# EAGLE board mi6k (EAGLE 4.11)
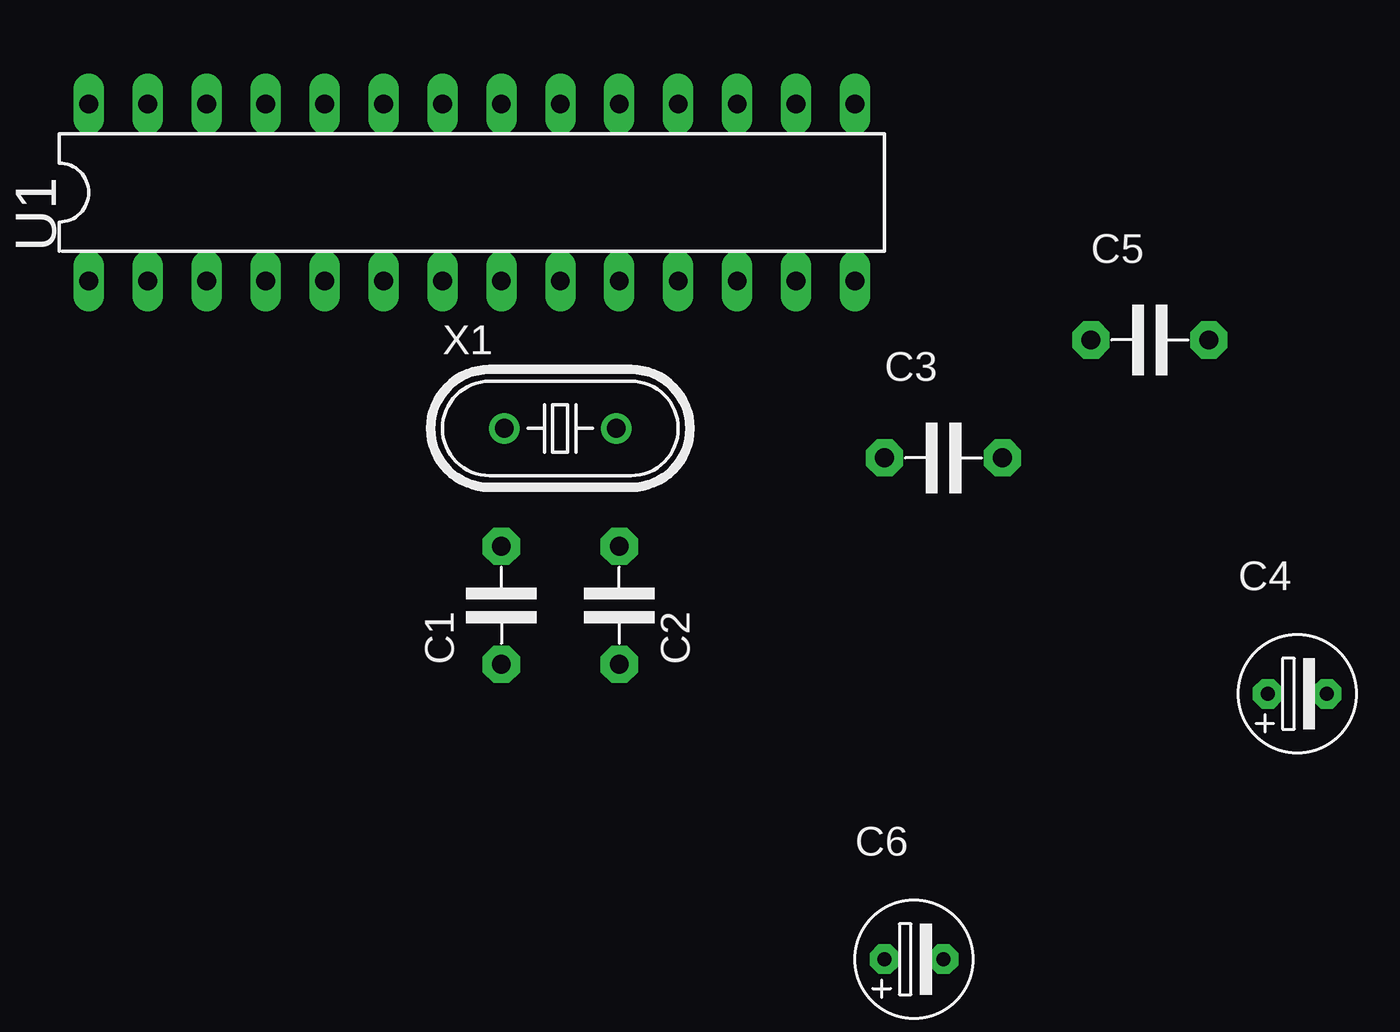
[diagram p0: board, top side]
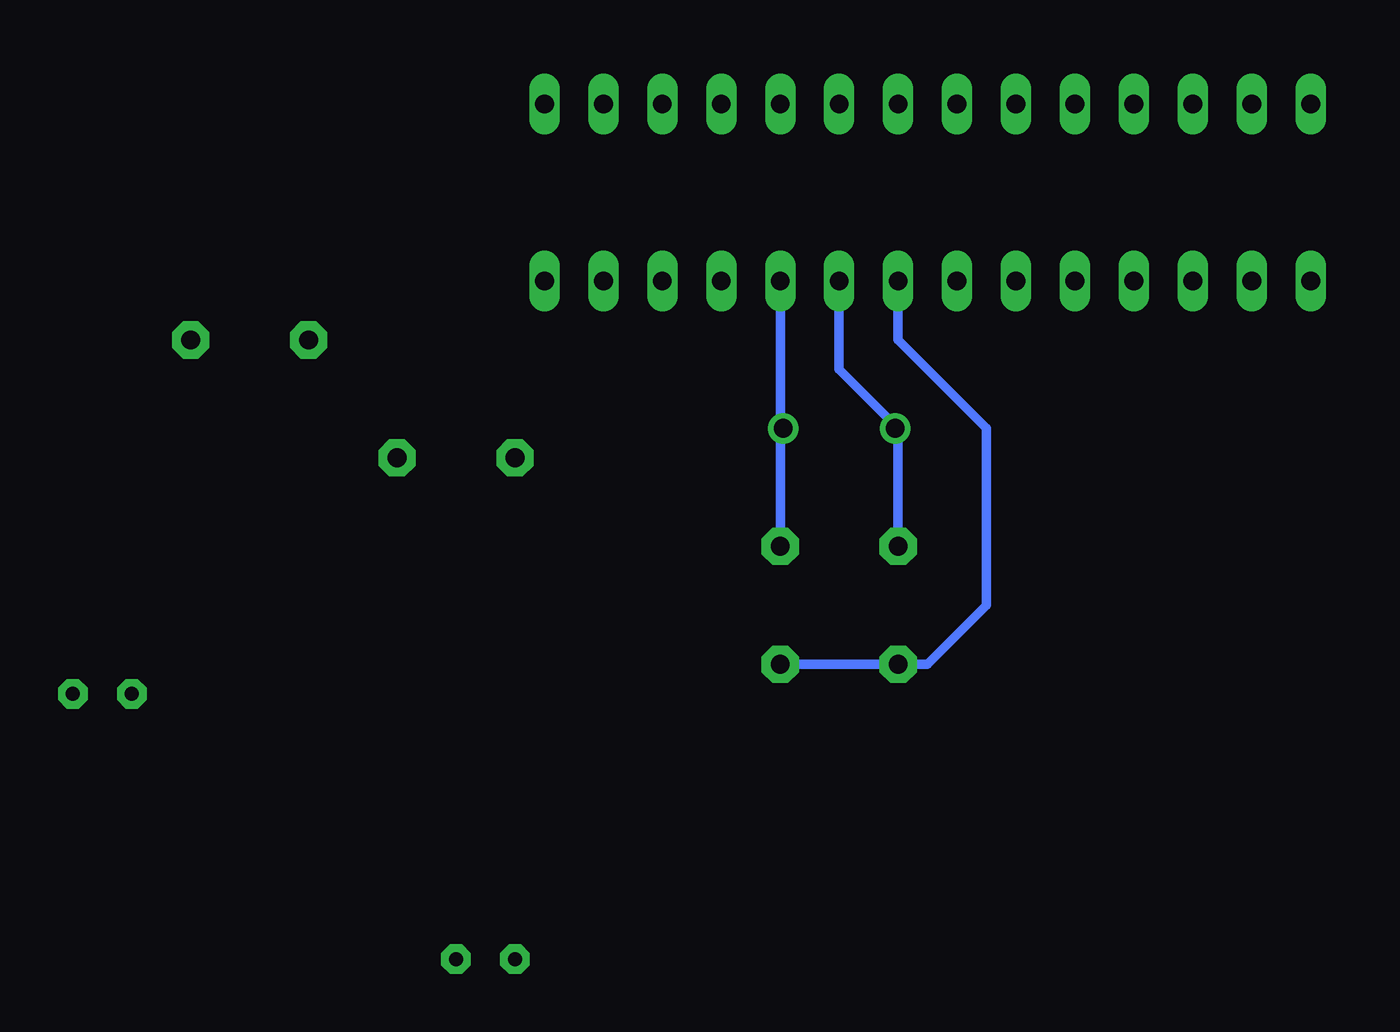
[diagram p1: board, bottom side, seen from below]

No outline drawn. Coordinates in mm, seen from the top.
Copper layers (1*16): Top 0.035mm / dielectric 1.5mm / Bottom 0.035mm
Design rules "default": minimum track width 10mil, minimum drill 24mil, track to track 8mil, track to pad 8mil, pad to pad 8mil, via to via 8mil, smd to smd 8mil, copper to edge 40mil, drill to drill 8mil, minimum pad ring 10mil, minimum via ring 8mil, stop-mask expansion 4mil, vias tented up to drill 0mil, thermal gap 10mil

## Footprints (pad centres in the part's own frame; a part is rotated, then mirrored left to right if it is on the bottom)
C-5 = drill 0.813 pad 1.6 octagon: 1 -2.54,0; 2 2.54,0
ES-2,5L = drill 0.61 pad 1.27 octagon: 1 0,0; 2 2.54,0
DIL28-3 = drill 0.813 long: 1 -16.51,-3.81; 2 -13.97,-3.81; 3 -11.43,-3.81; 4 -8.89,-3.81; 5 -6.35,-3.81; 6 -3.81,-3.81; 7 -1.27,-3.81; 8 1.27,-3.81; 9 3.81,-3.81; 10 6.35,-3.81; 11 8.89,-3.81; 12 11.43,-3.81; 13 13.97,-3.81; 14 16.51,-3.81; 15 16.51,3.81; 16 13.97,3.81; 17 11.43,3.81; 18 8.89,3.81; 19 6.35,3.81; 20 3.81,3.81; 21 1.27,3.81; 22 -1.27,3.81; 23 -3.81,3.81; 24 -6.35,3.81; 25 -8.89,3.81; 26 -11.43,3.81; 27 -13.97,3.81; 28 -16.51,3.81
HC49U70 = drill 0.813 round: 1 -2.413,0; 2 2.413,0

## Placement (x,y rotation side)
C1  [C-5]  41.91,36.83 90 top
C2  [C-5]  46.99,36.83 90 top
C3  [C-5]  60.96,43.18 0 top
C4  [ES-2,5L]  74.93,33.02 0 top
C5  [C-5]  69.85,48.26 0 top
C6  [ES-2,5L]  58.42,21.59 0 top
U1  [DIL28-3]  40.64,54.61 0 top
X1  [HC49U70]  44.45,44.45 0 top

## Library data of the parts
C1-C6 = discrete
U1 = microchip
X1 = crystal

## Nets
S$1: C2.2 U1.10
S$2: C1.2 U1.9
S$3: C2.1 U1.8

## Tracks (layer width: path | path; a pad name or v marks a point on that pad's centre or on a via)
S$1
  Bottom 0.406: C2.2 U1.10
S$2
  Bottom 0.406: U1.9 44.45,46.99 41.91,44.45 C1.2
S$3
  Bottom 0.406: U1.8 41.91,48.26 38.1,44.45 38.1,36.83 40.64,34.29 C2.1